# Altium PCB USB-I2C.PcbDoc
Units mil, origin at the board's own origin, x right, y up, seen from the top; angles counter-clockwise.
Board outline 1425 x 785 mil, 2 copper layers (Top Layer, Bottom Layer); 19 components, 18 nets, 80 pads, 0 vias.
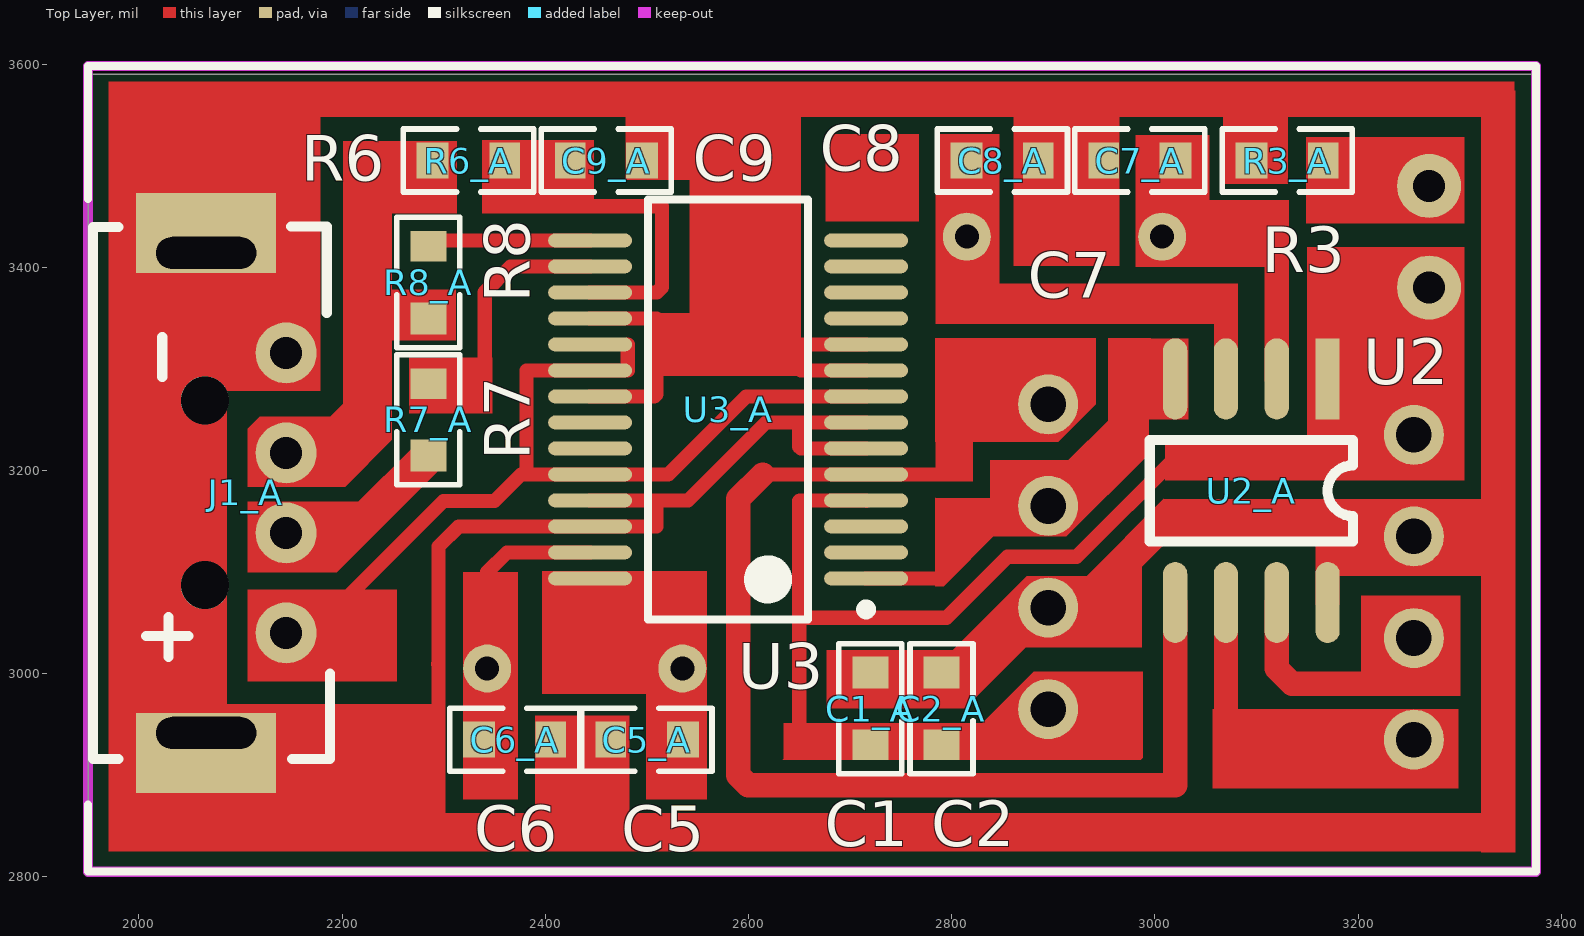
[diagram p0: Top Layer view]
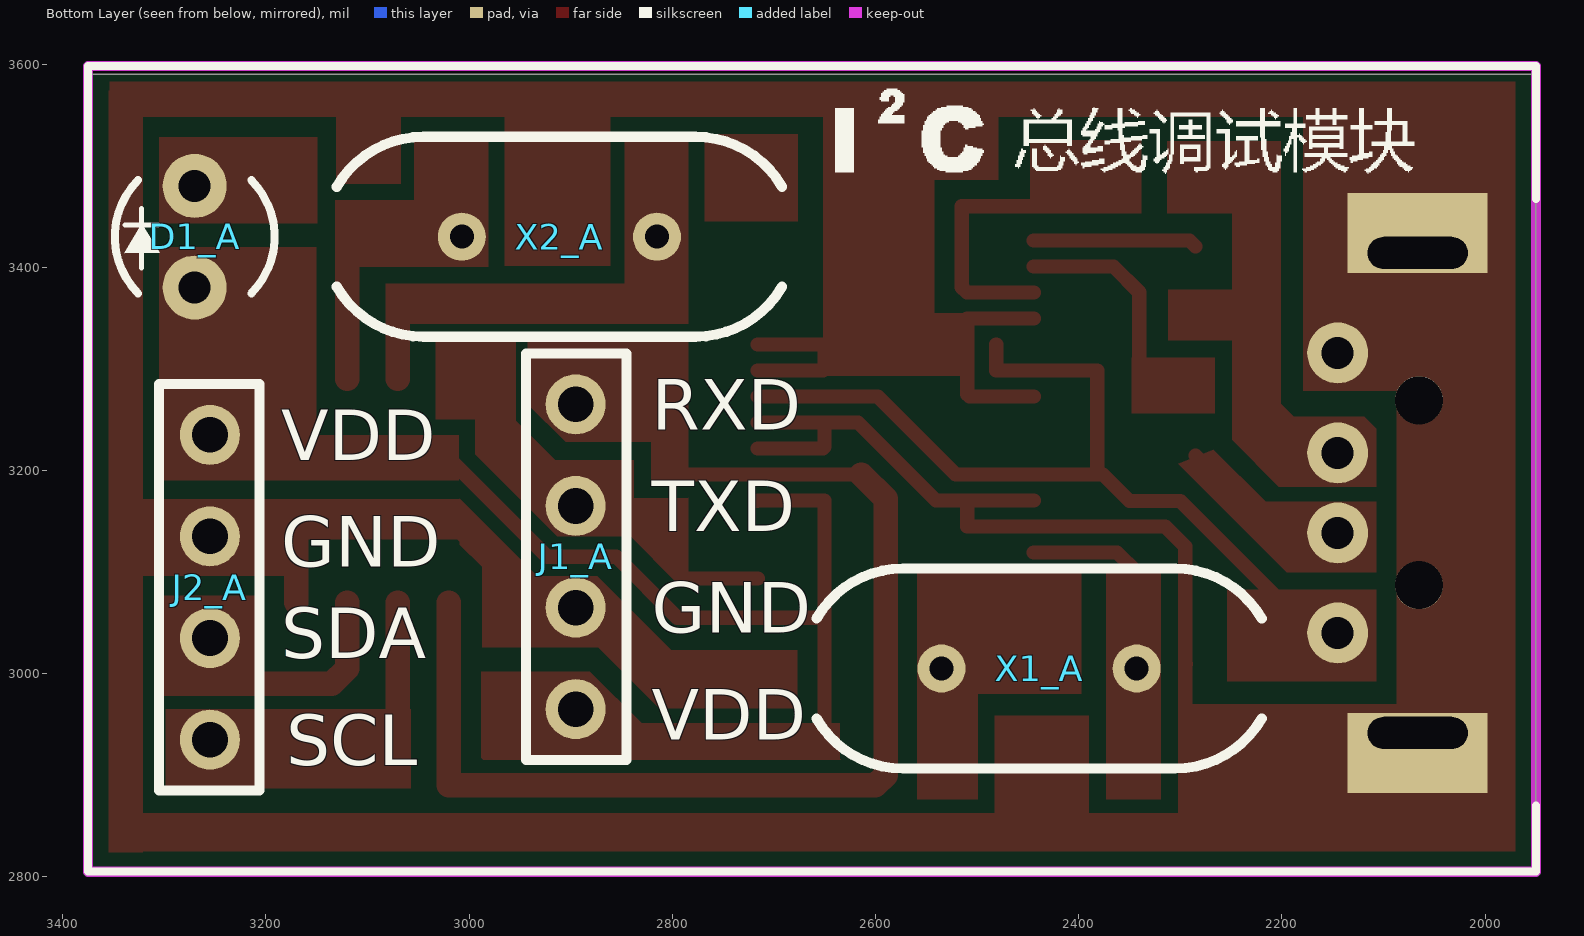
[diagram p1: Bottom Layer view, seen from below]

## Layer stack, top to bottom
Top Solder: solder mask 0.4, Solder Resist, Dk 3.5
Top Layer: signal copper 1.4
Dielectric 1: dielectric 12.6, FR-4, Dk 4.8
Bottom Layer: signal copper 1.4
Bottom Solder: solder mask 0.4, Solder Resist, Dk 3.5

## Board outline
1950,2805 3375,2805 3375,3590 1950,3590

## Design rules (kind name [scope] priority, off if disabled: settings)
Clearance [All] p1: gap=10 ignorepadtopadclearanceinfootprint=FALSE except(0: Arc-Hole Track-Hole SMDPad-Hole THPad-Hole Via-Hole Fill-Hole Poly-Hole Region-Hole Text-Hole)
PolygonConnect [All] p1: connectstyle=Relief reliefconductorwidth=10 reliefentries=4 polygonreliefangle="90 Angle" airgapwidth=10
RoomDefinition USB-I2C [InComponentClass('USB-I2C')] p1: confinementstyle=ConfineIn formatcopy=TRUE lockcomponents=FALSE outline 1335,2435 3495,2435 3495,3785 1335,3785
RoutingVias [All] p1: holewidth=28 width=50 viastyle="Through Hole" minholewidth=28 minwidth=50 maxholewidth=28 maxwidth=50
SolderMaskExpansion [All] p1: expansion=4
Width [All] p1: maxlimit=150 minlimit=10 preferedwidth=14
30 further rules are at their usual default settings.

## Classes and differential pairs
component class USB-I2C: C1_A C2_A C5_A C6_A C7_A C8_A C9_A D1_A J1_A J2_A R3_A R6_A R7_A R8_A U2_A U3_A X1_A X2_A

## Components (designator, comment, footprint, x,y, rotation, side; value= is the part's Value field where it differs from the comment)
C1_A "C1" 0603-my 2720,2965.43 r90 top value=0.1UF
C2_A "C2" 0603-my 2790,2965.43 r90 top value=10UF
C5_A "C5" 0603-my 2500,2935 r0 top value=15P
C6_A "C6" 0603-my 2370,2935 r180 top value=15P
C7_A "C7" 0603-my 2985,3505 r0 top value=15P
C8_A "C8" 0603-my 2850,3505 r180 top value=15P
C9_A "C9" 0603-my 2460,3505 r0 top value=0.1UF
D1_A "D1" LED3 3270,3430 r270 bottom
J1_A "J1" SIP-4-2.54 2895,2965 r90 bottom value=SIP4
J1_A "J1" USB-MAIE-A-DIP 2145,3040 r270 top
J2_A "J2" SIP-4-2.54 3255,3235 r270 bottom value=SIP4
R3_A "R3" 0603-my 3130.43,3505 r180 top value=1K
R6_A "R6" 0603-my 2324.57,3505 r180 top value=1.5K
R7_A "R7" 0603-my 2285,3250 r270 top value=33R
R8_A "R8" 0603-my 2285,3385 r270 top value=33R
U2_A "U2" SO-8 3170,3290 r270 top
U3_A "U3" SSOP-28 2580,3260 r180 top
X1_A "X1" XTAL-2 2342.87,3005 r0 bottom value=12M
X2_A "X2" XTAL-2 2815,3430 r0 bottom value=12M

## Footprints (in the part's own frame and the unit in brackets; to place one, negate y for a bottom-side part, rotate by r counter-clockwise, add the part's x,y. Pads: shape width x height; smd on the part's side, far side on the other; paste and mask are expansions set on the pad)
0603-my [mm]
  rect 0.762x0.9 smd: 1(-0.9,0)
  rect 0.8x0.9 smd: 2(0.9,0)
  silkscreen extent -1.63,-0.79 1.63,0.79, body extent -0.8,-0.4 0.8,0.4, height 1.6
LED3 [mm]
  round 1.6 hole 0.8: A(1.27,0) K(-1.27,0)
  silkscreen extent -1.41,-2 1.41,2, body extent -1.97,-2 1.55,2, height 5.2
SIP-4-2.54 [mm]
  round 1.5 hole 0.89: 1(0,0) 2(2.54,0) 3(5.08,0) 4(7.62,0)
  silkscreen extent -1.27,-1.27 8.89,1.24, body extent -11.57,-1.97 8.89,2.54, height 5
SO-8 [mil]
  rect 80x24 smd: 1(0,0)
  oval 80x24 smd: 2(0,-50) 3(0,-100) 4(0,-150) 5(220,-150) 6(220,-100) 7(220,-50) 8(220,0)
  silkscreen extent 60,-175 160,25, body extent -7,-170 220,23, height 61
SSOP-28 [mm] "SOP, 28-Leads, Body 10.5x5.3mm (max), Pitch 0.65mm, IPC Medium Density"
  oval 2.1x0.35 smd: 1(-3.45,4.225) 2(-3.45,3.575) 3(-3.45,2.925) 4(-3.45,2.275) 5(-3.45,1.625) 6(-3.45,0.975) 7(-3.45,0.325) 8(-3.45,-0.325) 9(-3.45,-0.975) 10(-3.45,-1.625) 11(-3.45,-2.275) 12(-3.45,-2.925) 13(-3.45,-3.575) 14(-3.45,-4.225) 15(3.45,-4.225) 16(3.45,-3.575) 17(3.45,-2.925) 18(3.45,-2.275) 19(3.45,-1.625) 20(3.45,-0.975) 21(3.45,-0.325) 22(3.45,0.325) 23(3.45,0.975) 24(3.45,1.625) 25(3.45,2.275) 26(3.45,2.925) 27(3.45,3.575) 28(3.45,4.225)
  silkscreen extent -3.58,-5.25 2,5.25, body extent -3.92,-5.17 3.84,5.16, height 2.15
USB-MAIE-A-DIP [mm]
  round 1.524 hole 0.8: 1(0,0) 2(-2.5,0) 3(-4.5,0) 4(-7,0)
  rect 2x3.5 hole 0.8 slot 2.5 at 90 deg copper offset 0.5,0: 5(2.5,-2)
  rect 2x3.5 hole 0.8 slot 2.5 at 90 deg copper offset -0.5,0: 6(-9.5,-2)
  round 1.2 hole 1.2: 7(-1.194,-2.032) 8(-5.817,-2.032)
  silkscreen extent -10.16,-4.83 3.15,1.1, body extent -9.77,-19.72 2.83,0.2, height 3.5
XTAL-2 [mm]
  round 1.2 hole 0.6: 1(0,0) 2(4.88,0)
  silkscreen extent -3.13,-2.5 8.01,2.5, body extent -2.95,-2.26 7.85,2.24, height 4.01

## Part data
C1_A C2_A C5_A C6_A C7_A C8_A C9_A: library part CAP
D1_A: library part B_LED
J1_A J2_A: library part SIP-4
J1_A: library part USB-A1
R3_A R6_A R7_A R8_A: library part RES
U2_A: library part EM78P153SO8
U3_A: library part PL2303HX
X1_A X2_A: library part CRYSTAL_2

## Nets (pads, with @x,y where several pads share a name; then routed paths per layer and width w, separated by ;. In a path a pad name is that pad's centre, name@x,y a point inside that pad or via, vN(x,y) a via of type N, cw(c..) or ccw(c..) an arc to the next point about the centre after c; other vN are vias at no path point)
CTS: U3_A.11
GND_K: C1_A.2 C2_A.2 C5_A.1 C6_A.1 C7_A.1 C8_A.1 C9_A.2 J1_A.2@2895,3065 J1_A.4@2145,3315.59 J1_A.5 J1_A.6 J1_A.7 J1_A.8 J2_A.2 R3_A.2 U2_A.8 U3_A.6 U3_A.7 U3_A.9 U3_A.10 U3_A.18 U3_A.21 U3_A.25 U3_A.26 | length 6567.8
  Top Layer w14: J1_A.5 2065,2942.83 J1_A.7 J1_A.8 2065,3315 2065.59,3315.59 2145,3315.59 2145,3415 ; J1_A.6 2144.02,3414.02 2145,3415 ; 2294.41,3009.41 2295,3010 ; C6_A.1 2440,2935 ; U3_A.25 2540.43,3170.43 2617.2,3247.2 2650,3247.2 ; U3_A.21 2507.36,3272.8 2509.57,3275 2509.57,3300 ; U3_A.18 2509.57,3349.57 2509.57,3300 ; C5_A.1 2440,2935 ; C9_A.2 2506.43,3494 2599.43,3494 2615,3509.57 2615,3555 ; 2509.57,3170 2509.57,3144.84 U3_A.26 2314.84,3144.84 2295,3125 2295,3010 ; 2615.43,3510 2615.43,3304.57 2620,3300 ; U3_A.6 2651.61,3221.61 2650,3223.23 2650,3247.2 ; U3_A.7 2650,3247.2 ; U3_A.9 2651.61,3298.39 2650,3300 ; U3_A.10 2651.02,3323.98 2650,3322.95 2650,3300 ; C1_A.2 C2_A.2 2800.87,3000.87 2865,3065 2895,3065 2930,3065 2930,3060 3035,3165 3330,3165 ; C8_A.1@2885.43,3495 2915,3495 ; C7_A.1@2949.57,3495 2915,3495 ; R3_A.2 3095,3555 ; 2145,3415 2145,3549.41 2150.59,3555 2615,3555 ; 2295,3010 2295,2855 2440,2855 ; 2440,2855 3330,2855 3330,3165 ; 2440,2855 2440,2935 ; 2509.57,3300 2620,3300 ; 2615,3555 2915,3555 ; 2620,3300 2650,3300 ; 2915,3495 2915,3555 ; 2915,3555 3095,3555 ; 3095,3555 3330,3555 3330,3165
  Top Layer w24: U2_A.8 3170,3147
NetC7_A_2: C7_A.2 U2_A.2 X2_A.2 | length 296.4
  Top Layer w14: C7_A.2@3020.43,3495 3020.43,3430.43 3020,3430 3105,3430 3120,3415
  Top Layer w24: U2_A.2 3120,3415
NetC8_A_2: C8_A.2 U2_A.3 X2_A.1 | length 451.4
  Top Layer w24: C8_A.2@2814.57,3495 2814.57,3430.43 X2_A.1 2815,3370 3055,3370 3070,3355 U2_A.3
NetC9_A_1: C9_A.1 R6_A.1 U3_A.17 | length 347.7
  Top Layer w14: R6_A.1 C9_A.1 2424.57,3468.43 2433,3460 2515,3460 2515,3380.31 2509.84,3375.16 U3_A.17
NetD1_A_K: D1_A.K R3_A.1 | length 139.5
  Top Layer w14: R3_A.1 3245,3505 D1_A.K D1_A.K@3295,3480
NetJ1_A_2: J1_A.2@2145,3138.42 R7_A.2 | length 171.5
  Top Layer w14: J1_A.2@2145,3138.42 2146.58,3140 2210.43,3140 R7_A.2
NetJ1_A_3: J1_A.3@2145,3217.16 R6_A.2 R8_A.2 | length 421.7
  Top Layer w14: J1_A.3@2145,3217.16 2162.16,3217.16 2235,3290 2235,3349.57 ; R8_A.2 2235,3349.57 ; R6_A.2 2265,3505 2235,3475 2235,3349.57
NetR7_A_1: R7_A.1 U3_A.16 | length 259.7
  Top Layer w14: R7_A.1 2340.43,3285.43 2340.43,3375.43 2365.75,3400.75 U3_A.16
NetR8_A_1: R8_A.1 U3_A.15 | length 161.6
  Top Layer w14: R8_A.1 2290.91,3426.34 U3_A.15
OSC1: C6_A.2 U3_A.27 X1_A.1 | length 277.6
  Top Layer w14: C6_A.2 2334.57,2996.69 X1_A.1 2342.87,3099.87 2362.25,3119.25 U3_A.27
OSC2: C5_A.2 U3_A.28 X1_A.2 | length 249.7
  Top Layer w14: U3_A.28 2444.17,3005 X1_A.2 2535,2935.43 C5_A.2
RX_K: J1_A.4@2895,3265 U2_A.5 U3_A.5 | length 1152.1
  Top Layer w14: 2614.02,3196.02 U3_A.5 2812,3196.02
  Top Layer w24: 2614.02,3196.02 2590,3172 2590,2900 2600,2890 3020,2890 U2_A.5 ; 2857,3270 J1_A.4@2891,3270
SCL_K: J2_A.4 U2_A.6 | length 320
  Top Layer w24: U2_A.6 3070,2935 J2_A.4
SDA_K: J2_A.3 U2_A.7 | length 251.2
  Top Layer w24: U2_A.7 3120,3005 3135,2990 3255,2990 J2_A.3
TX_K: J1_A.3@2895,3165 U2_A.4 U3_A.1 | length 288.3
  Top Layer w14: U3_A.1 2786.66,3093.66 ; 2858,3165 2866.06,3165 2875.06,3156 J1_A.3@2895,3156 ; J1_A.3@2895,3165 U2_A.4
VCC_K: J1_A.1@2145,3040 U3_A.8 U3_A.19 U3_A.20 U3_A.24 | length 896.2
  Top Layer w14: J1_A.1@2145,3040 2170,3040 2300,3170 2350,3170 2376.02,3196.02 2385,3196.02 ; U3_A.19@2481.17,3323.98 2481.17,3298.39 2381.61,3298.39 2381.61,3199.41 2385,3196.02 ; U3_A.8 2597.8,3272.8 2521.02,3196.02 U3_A.24 2385,3196.02
Vuser: C1_A.1 C2_A.1 D1_A.A J1_A.1@2895,2965 J2_A.1 U2_A.1 U3_A.4 | length 1509
  Top Layer w14: U3_A.4@2716.26,3170 U3_A.4 2650.43,3170.43 2650,3170 2650,3055 ; J1_A.1@2895,2965 2860,2930 C2_A.1 C1_A.1 2660,2930 2650,2940 2650,3055 ; J2_A.1 3255,3325 ; D1_A.A@3295,3380 3275,3380 3255,3360 3255,3325 ; 2650,3055 2795,3055 2855,3115 2923,3115 3023,3215 3160,3215 3170,3225 U2_A.1 3170,3325 3255,3325
pads on no net: U3_A.2 U3_A.3 U3_A.12 U3_A.13 U3_A.14 U3_A.22 U3_A.23

## Keep-outs
Keep-Out Layer:
  lines w10: 1950,2805 3375,2805 3375,3598 1950,3598 1950,2805

## Other copper
Top Layer:
  rectangle: 2676,3445 2768,3531
  rectangle net GND_K: 2509.57,3302 2557,3355
  rectangle net GND_K: 2542,3298.39 2651.61,3520
  rectangle net GND_K: 2078,3278 2179,3563
  rectangle net GND_K: 2065,2855 2295,2970
  rectangle net GND_K: 1970,2842 2087,3583
  rectangle net GND_K: 1970,3552 3354,3583
  rectangle net GND_K: 1970,2825 3353,2863
  rectangle net GND_K: 3321,2824 3355,3574
  rectangle net VCC_K: 2107,2992 2254,3083
  rectangle net NetR7_A_1: 2266,3256 2348,3311
  rectangle net NetJ1_A_3: 2239,3328 2312,3378
  rectangle net NetJ1_A_3: 2201,3453 2313,3524
  rectangle net GND_K: 2479,3486 2651.61,3550
  rectangle net NetC9_A_1: 2338,3453 2448,3525
  rectangle net GND_K: 2390,2856 2483,2959
  rectangle net OSC1: 2319,2876 2373,3099.87
  rectangle net OSC2: 2499,2876 2559,2985
  rectangle net OSC2: 2397,2980 2559,3101
  rectangle net RX_K: 2784,3189 2821,3240
  rectangle net TX_K: 2971,3250 3033,3330
  rectangle net SCL_K: 3057,2887 3299,2965
  rectangle net GND_K: 3175,3096 3330,3140
  rectangle net GND_K: 3009,3132 3330,3172
  rectangle net Vuser: 3010,3190 3152,3235
  rectangle net SDA_K: 3203,2978 3301,3077
  rectangle net NetC8_A_2: 2807,3344 3082,3384
  rectangle net NetC8_A_2: 2784,3344 2847,3531
  rectangle net GND_K: 2861,3401 2965,3552
  rectangle net GND_K: 3067,3482 3131,3552
  rectangle net NetC7_A_2: 3048,3400 3132,3466
  rectangle net NetC7_A_2: 2981,3400 3054,3530
  rectangle net NetD1_A_K: 3149,3443 3305,3528
  rectangle net Vuser: 3150,3190 3305,3420
  region net NetJ1_A_2: 2267.5,3220.5 2216,3169 2107,3169 2107,3100 2195,3100 2301.79,3206.79
  region net NetJ1_A_3: 2202,3466 2201,3465 2201,3261 2193,3253 2119,3253 2107,3241 2107,3184 2203,3184 2249,3230 2249,3466
  region net TX_K: 2846,3172.5 2784.5,3172.5 2784,3173 2784,3086 2792,3086 2846,3140
  region net RX_K: 2784,3330 2784,3228 2831,3228 2905,3228 2942,3265 2942,3330
  region net TX_K: 2838,3135 2913,3135 2994,3216 2994,3328 2996,3330 2954,3330 2954,3249 2915,3210 2838,3210
  region net Vuser: 2829,2947 2829,2950 2881,3002 2988,3002 2988,2945.98
  region net GND_K: 3009,3172 2933,3096 2874,3096 2801,3023 2677,3023 2677,2966 2813,2966 2873,3026 2987,3026 2987,3105 3009,3127
  region net Vuser: 2988,2951 2635,2951 2635,2916 2634,2915 2986,2915 2988,2917

## Silkscreen, mask and mechanical layers (free items; w line width, h text height)
Top Overlay:
  lines w7.87: 1950,2871 1950,2805 3375,2805 3375,3598 1950,3598 1950,3467
Bottom Overlay:
  drawing of 921 lines, arcs and shapes, not listed
  text "RXD" at 2820,3240 h50
  text "VDD" at 3185,3210 h50
  text "TXD" at 2820,3140 h50
  text "GND" at 3185,3105 h50
  text "GND" at 2820,3040 h50
  text "SDA" at 3185,3015 h50
  text "VDD" at 2820,2935 h50
  text "SCL" at 3180,2910 h50
Top Solder:
  rectangle: 2397,3042 2491,3100
  rectangle: 2676,3445 2769,3532